# Altium PCB MolsonPCB.PcbDoc (part 6 of 9)
Units mil, origin at the board's own origin, x right, y up, seen from the top; angles counter-clockwise.
Board outline 8000 x 6000 mil, 14 copper layers (TopLayer (1 oz), InternalPlane1 (0.5 oz), InternalPlane2 (0.5 oz), MidLayer1 (0.5 oz), InternalPlane3 (0.5 oz), MidLayer2 (0.5 oz), InternalPlane4 (0.5 oz), InternalPlane5 (0.5 oz), MidLayer3 (0.5 oz), InternalPlane6 (0.5 oz), MidLayer4 (0.5 oz), InternalPlane7 (0.5 oz), InternalPlane8 (0.5 oz), BottomLayer (1 oz)), stack 86.2 mil thick; 657 components, 643 nets, 3094 pads, 1958 vias.
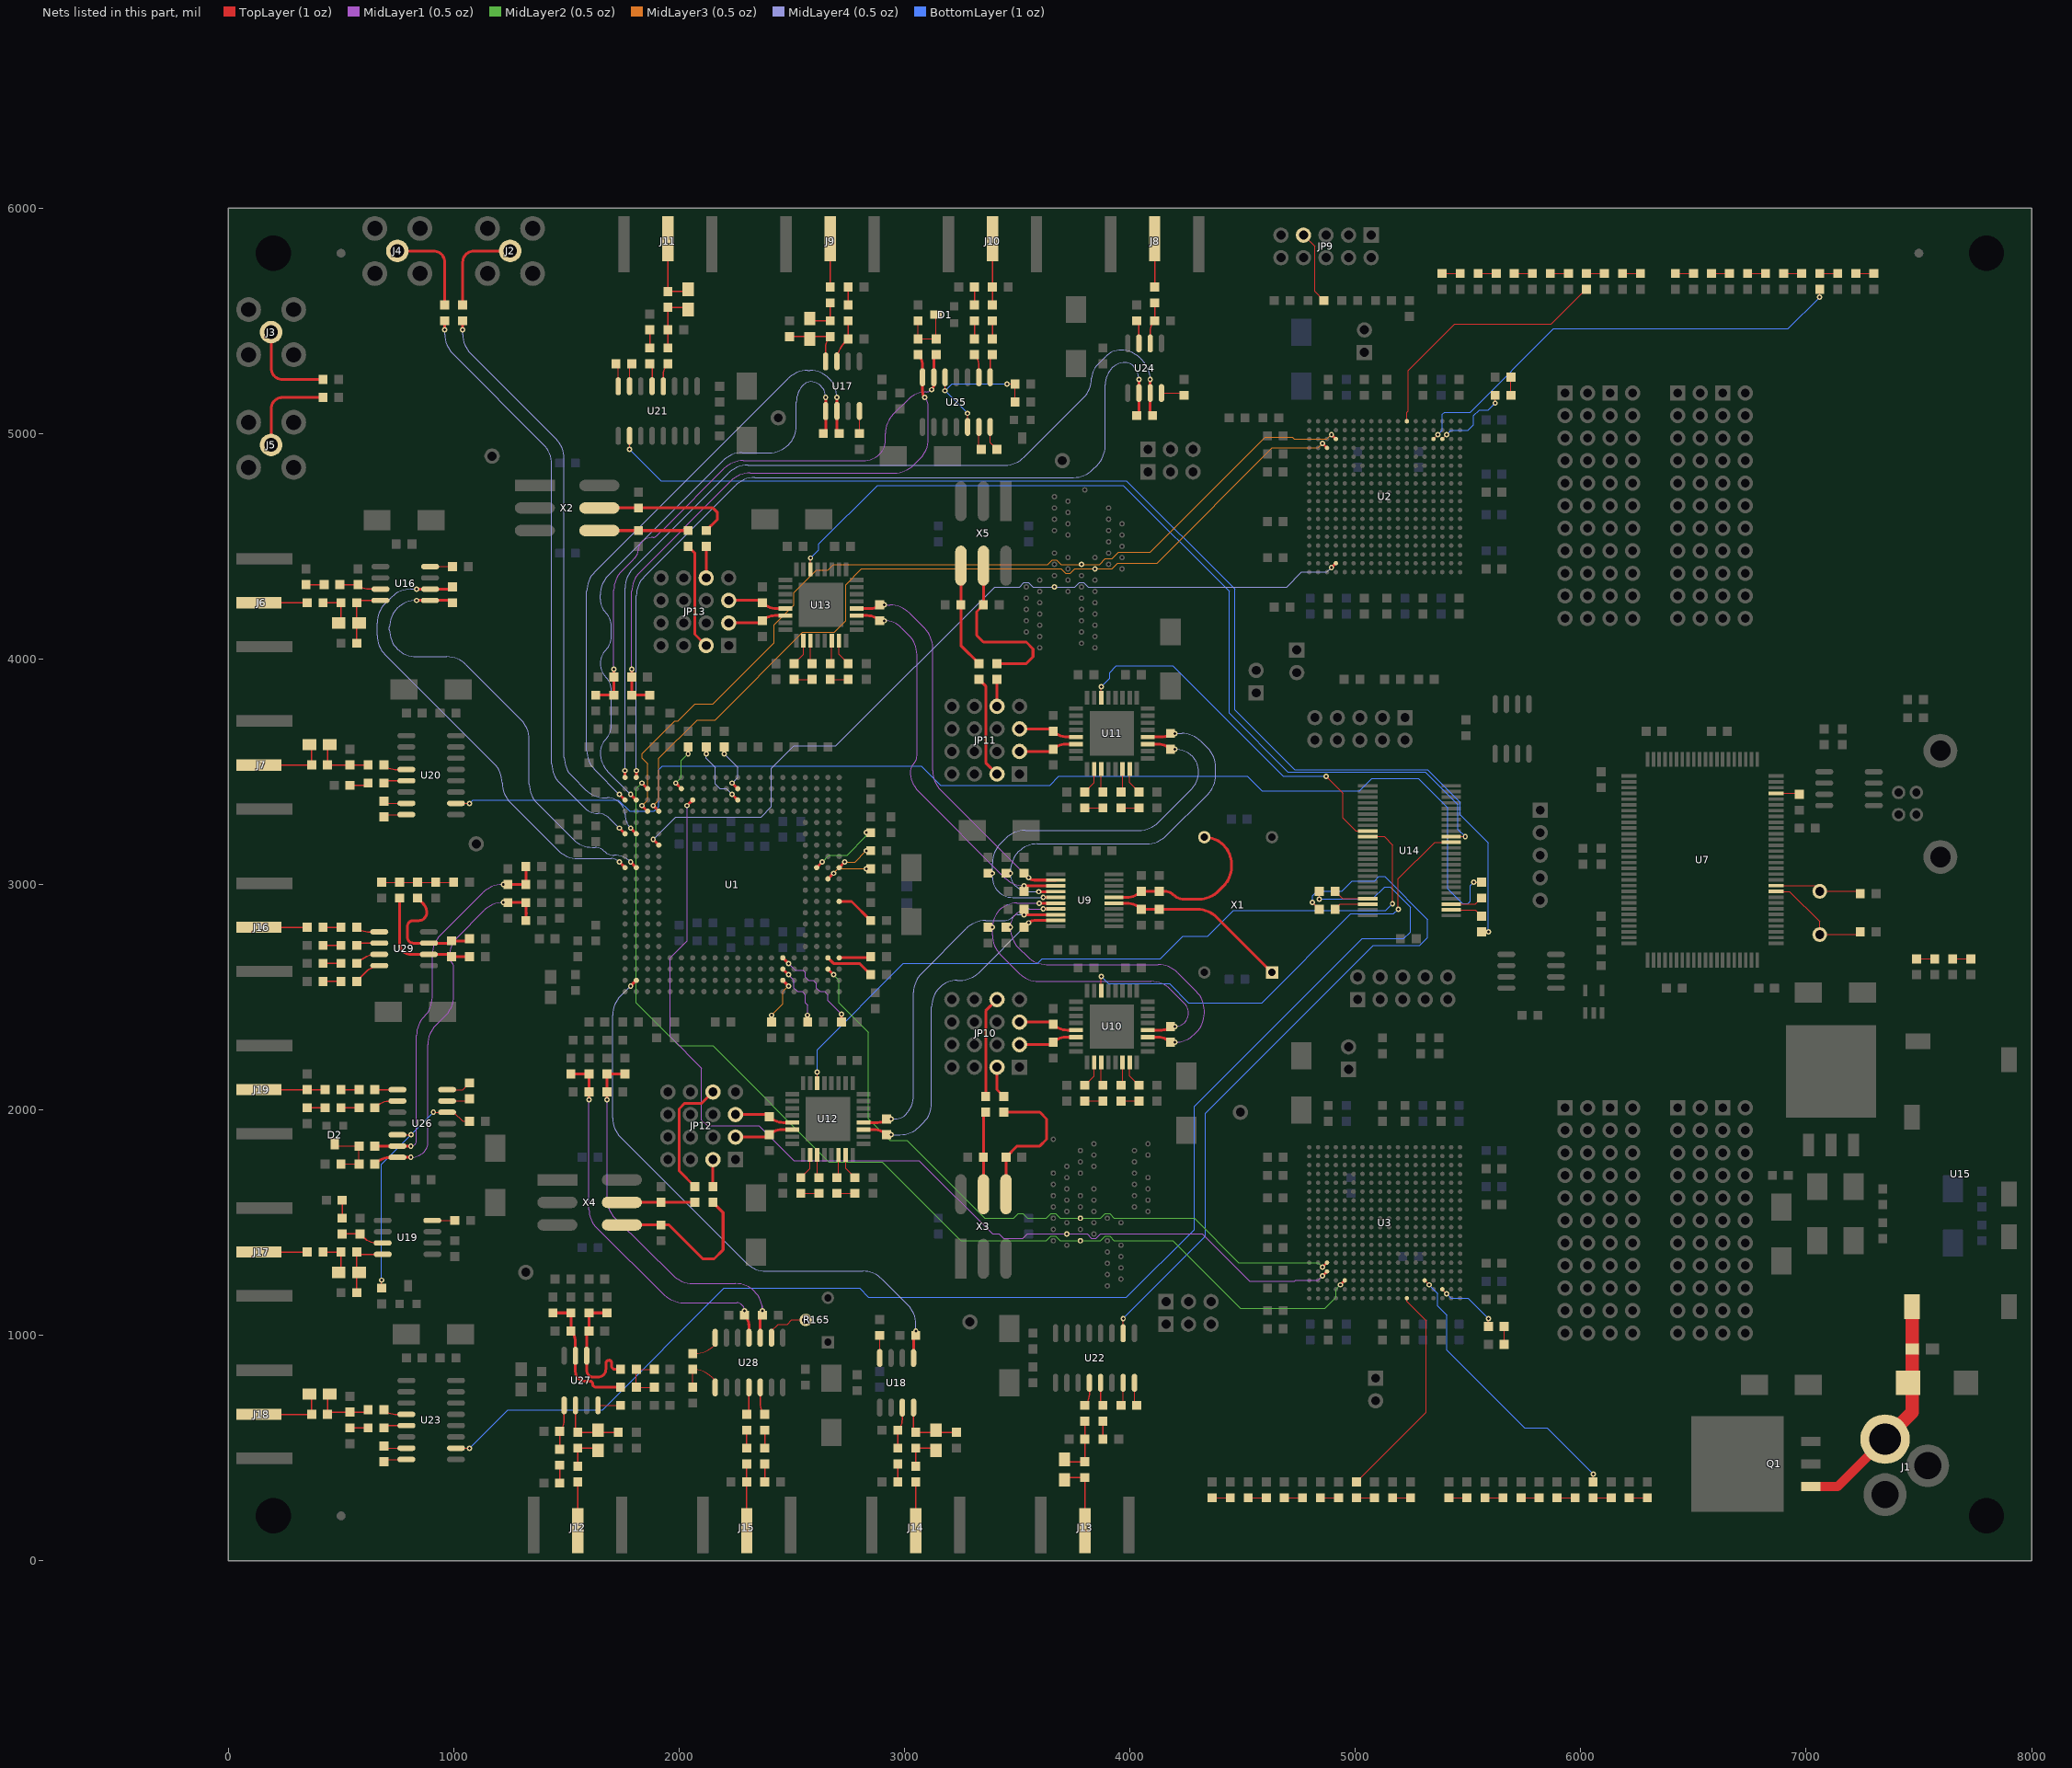
[diagram p18: the nets of this part, all layers, seen from the top]

## Via types
v1: diameter 24, hole 12, TopLayer (1 oz) to BottomLayer (1 oz), 1958 vias

## Nets (pads, with @x,y where several pads share a name; then routed paths per layer and width w, separated by ;. In a path a pad name is that pad's centre, name@x,y a point inside that pad or via, vN(x,y) a via of type N, cw(c..) or ccw(c..) an arc to the next point about the centre after c; other vN are vias at no path point) (continued)
L\F\I\D\: pad.TVIA@3780,1520 U1.W3 U3.T14 | length 3103.6
  TopLayer (1 oz) w12: U1.W3@2660,2625 v1(2685,2600) ; v1(4854.41,1303.15) U3.T14@4874.1,1322.84
  MidLayer2 (0.5 oz) w5: v1(2685,2600) 2710,2575 2710,2475 2840,2345 2840,1960 2935,1865 3010,1865 3355,1520 3485,1520 3505,1540 3525,1540 3545,1520 3630,1520 3650,1540 3670,1540 3690,1520 3870,1520 3890,1540 3910,1540 3930,1520 4285,1520 4482.17,1322.83 4834.72,1322.83 v1(4854.41,1303.15)
LDTDEN: pad.TVIA@3785,4420 U1.C17 U2.D16 | length 4062.2
  TopLayer (1 oz) w12: v1(1835,3350) U1.C17@1860,3325 ; v1(4893.78,4995.59) U2.D16@4913.47,4975.9
  MidLayer3 (0.5 oz) w5: v1(1835,3350) 1860,3375 1860,3535 1835,3560 1835,3580 1980,3725 1995,3725 2070.07,3800.07 2150.07,3800.07 2421.2,4071.2 2421.2,4151.2 2510,4240 2510,4295 2610,4395 2660,4395 2685,4420 3635,4420 3655,4440 3675,4440 3695,4420 3865,4420 3890,4445 3920,4445 3950,4475 4090,4475 4600,4985 4720,4985 4729.09,4975.91 4874.1,4975.91 v1(4893.78,4995.59)
LFIA_04: R168.1 U2.M18 | length 1167.2
  TopLayer (1 oz) w5: U2.M18@5228.43,5054.65 5228.43,5093.43 5235,5100 5235,5280 5440,5485 5870,5485 R168.1@6025,5640
LFIB_04: R174.1 U2.R16 | length 2050.4
  TopLayer (1 oz) w5: U2.R16@5346.53,4975.9 v1(5366.22,4995.59) ; v1(7060,5605) R174.1@7060,5640
  BottomLayer (1 oz) w5: v1(5366.22,4995.59) 5385.91,5015.28 5385.91,5085.91 5395,5095 5510,5095 5880,5465 6920,5465 v1(7060,5605)
LFIC_05: R180.1 U3.G18 | length 979.6
  TopLayer (1 oz) w5: R180.1@5005,350 5315,660 5315,1065 5228.43,1151.57 U3.G18@5228.43,1165.35
LFID_05: R186.1 U3.E16 | length 1262.4
  TopLayer (1 oz) w5: U3.E16@5307.16,1244.1 v1(5326.85,1224.41) ; R186.1@6055,350 v1(6055,385)
  BottomLayer (1 oz) w5: v1(5326.85,1224.41) 5365,1186.26 5365,1130 5405,1090 5405,935 5750,590 5850,590 v1(6055,385)
LOCKEDA_07: U11.14 U14.33 | length 1652.2
  TopLayer (1 oz) w5: U11.14@3872.76,3828.46 v1(3872.76,3877.24) ; v1(4870,3480) 4945,3405 4945,3295 5002.5,3237.5 U14.33@5054.96,3237.5
  BottomLayer (1 oz) w5: v1(3872.76,3877.24) 3910,3914.49 3910,3940 3940,3970 4190,3970 4680,3480 v1(4870,3480)
LOCKEDB_07: U13.14 U14.15 | length 4190.5
  TopLayer (1 oz) w5: U13.14@2582.76,4398.46 v1(2582.76,4447.76) ; U14.15@5425.04,3212.5 v1(5487.5,3212.5)
  BottomLayer (1 oz) w5: v1(2582.76,4447.76) 2620,4485 2620,4510 2880,4770 3970,4770 4440,4300 4440,3760 4700,3500 5310,3500 5455,3355 5455,3245 v1(5487.5,3212.5)
LOCKEDC_07: U12.14 U14.34 | length 3355.2
  TopLayer (1 oz) w5: U12.14@2612.76,2118.46 v1(2612.76,2167.76) ; U14.34@5054.96,3212.5 5127.5,3212.5 5165,3175 v1(5165,2915)
  BottomLayer (1 oz) w5: v1(2612.76,2167.76) 2612.76,2267.76 2995,2650 3590,2650 3610,2670 4135,2670 4235,2770 4345,2770 4460,2885 5135,2885 v1(5165,2915)
LOCKEDD_07: U10.14 U14.14 | length 2039.6
  TopLayer (1 oz) w5: U10.14@3872.76,2528.46 v1(3872.76,2592.76) ; v1(5190,2890) 5190,3025 5352.5,3187.5 U14.14@5425.04,3187.5
  BottomLayer (1 oz) w5: v1(3872.76,2592.76) 3905.51,2560 4175,2560 4260,2475 4585,2475 4980,2870 5170,2870 v1(5190,2890)
LPENA: pad.TVIA@3845,4400 U1.D17 U2.C15 | length 3916.6
  TopLayer (1 oz) w12: v1(1885,3350) U1.D17@1910,3325 ; v1(4854.41,4956.22) U2.C15@4874.1,4936.53
  MidLayer3 (0.5 oz) w5: v1(1885,3350) 1910,3375 1910,3560 2080,3730 2160,3730 2548.26,4118.26 2688.26,4118.26 2740,4170 2740,4330 2810,4400 3695,4400 3715,4380 3735,4380 3755,4400 3920,4400 3945,4425 4120,4425 4631.54,4936.54 4834.73,4936.54 v1(4854.41,4956.22)
LPENB: pad.TVIA@3665,4320 U1.D14 U2.D2 | length 3703.8
  TopLayer (1 oz) w12: v1(1885,3200) U1.D14@1910,3175 ; v1(4893.78,4405.04) U2.D2@4913.47,4424.73
  MidLayer4 (0.5 oz) w5: v1(1885,3200) 1985,3300 2365,3300 2410,3345 2410,3515 2510,3615 2695,3615 3400,4320 3510,4320 3530,4340 3550,4340 3570,4320 3755,4320 3775,4340 3795,4340 3815,4320 4695,4320 4760.35,4385.35 4874.1,4385.35 v1(4893.78,4405.04)
LPENC: pad.TVIA@3720,1450 U1.G18 U3.T15 | length 4640.8
  TopLayer (1 oz) w12: v1(2035,3350) U1.G18@2060,3375 ; v1(4854.41,1263.78) U3.T15@4874.1,1283.47
  MidLayer1 (0.5 oz) w5: v1(2035,3350) 2035,2750 1960,2675 1960,2325 2100,2185 2100,1955 2125,1930 2355,1930 2510,1775 3065,1775 3390,1450 3420,1450 3440,1430 3525,1430 3545,1450 3810,1450 3830,1430 3850,1430 3870,1450 4320,1450 4530,1240 4730,1240 4734.09,1244.09 4834.73,1244.09 v1(4854.41,1263.78)
LPEND: pad.TVIA@3780,1420 U1.C19 U3.P16 | length 4830.6
  TopLayer (1 oz) w12: v1(1835,3450) U1.C19@1860,3425 ; v1(4933.15,1224.41) U3.P16@4952.84,1244.1
  MidLayer2 (0.5 oz) w5: v1(1835,3450) 1810,3425 1810,2475 2000,2285 2150,2285 2665,1770 2900,1770 3250,1420 3630,1420 3650,1440 3670,1440 3690,1420 3870,1420 3890,1440 3910,1440 3930,1420 4190,1420 4490,1120 4865,1120 4913.47,1168.47 4913.47,1204.72 v1@4933.15,1224.41
MCLADJA: R22.1 U20.10 | length 5379
  TopLayer (1 oz) w5: U20.10@1010,3360 v1(1070,3360) ; v1(5525,3010) R22.1@5560,3010
  BottomLayer (1 oz) w5: v1(1070,3360) 1085,3375 1730,3375 1780,3325 1890,3325 1910,3345 1910,3510 1925,3525 3075,3525 3160,3440 3645,3440 3685,3480 4520,3480 4585,3415 5019.14,3415 5074.14,3470 5280,3470 5410,3340 5410,2980 5475,2915 5500,2915 5510,2925 5510,2995 v1(5525,3010)
MCLADJB: R20.1 U21.10 | length 5363.4
  TopLayer (1 oz) w5: v1(1780,4930) U21.10@1780,4990 ; R20.1@5560,2790 v1(5590,2790)
  BottomLayer (1 oz) w5: v1(1780,4930) 1920,4790 3985,4790 4465,4310 4465,3775 4730,3510 5320,3510 5465,3365 5465,3310 5590,3185 v1(5590,2790)
MCLADJC: R19.2 U22.10 | length 3210.6
  TopLayer (1 oz) w5: U22.10@3970,1010 v1(3970,1075) ; v1(4810,2920) R19.2@4840,2890
  BottomLayer (1 oz) w5: v1(3970,1075) 4335,1440 4335,1985 5080,2730 5285,2730 5320,2765 5320,2845 5130,3035 5105,3035 5085,3015 4985,3015 4940,2970 4830,2970 4810,2950 v1(4810,2920)
MCLADJD: R21.2 U23.10 | length 6146
  TopLayer (1 oz) w5: U23.10@1010,500 v1(1070,500) ; v1(4840,2935) R21.2@4840,2970
  BottomLayer (1 oz) w5: v1(1070,500) 1240,670 1660,670 2200,1210 2800,1210 2840,1170 3985,1170 4285,1470 4285,2015 5030,2760 5215,2760 5245,2790 5245,2900 5155,2990 5130,2990 5075,2935 v1(4840,2935)
NetC41_2: C41.2 U7.10 Y1.2 | length 465.8
  TopLayer (1 oz) w5: U7.10@6866.97,2969.25 6925.75,2969.25 7060,2835 Y1.2@7060,2797.87 ; Y1.2@7060,2777.87 C41.2@7240,2777.87
NetC42_2: C42.2 U7.11 Y1.1 | length 383.3
  TopLayer (1 oz) w5: U7.11@6866.97,2994.84 7035.16,2994.84 Y1.1@7060,2970 C42.2@7240,2970
NetC43_1: C43.1 R23.2 | length 80
  TopLayer (1 oz) w5: C43.1@3960,2040 R23.2@4040,2040
NetC43_2: C43.2 U10.30 | length 101.5
  TopLayer (1 oz) w5: C43.2@3967.24,2110 U10.30@3967.24,2211.54
NetC44_1: C44.1 R24.2 | length 80
  TopLayer (1 oz) w5: C44.1@3800,2040 R24.2@3880,2040
NetC44_2: C44.2 U10.26 | length 118.6
  TopLayer (1 oz) w5: C44.2@3800,2110 3841.26,2151.26 U10.26@3841.26,2211.54
NetC48_1: C48.1 R25.2 | length 80
  TopLayer (1 oz) w5: C48.1@3960,3340 R25.2@4040,3340
NetC48_2: C48.2 U11.30 | length 101.5
  TopLayer (1 oz) w5: C48.2@3967.24,3410 U11.30@3967.24,3511.54
NetC49_1: C49.1 R26.2 | length 80
  TopLayer (1 oz) w5: C49.1@3800,3340 R26.2@3880,3340
NetC49_2: C49.2 U11.26 | length 118.6
  TopLayer (1 oz) w5: C49.2@3800,3410 3841.26,3451.26 U11.26@3841.26,3511.54
NetC53_1: C53.1 R27.2 | length 80
  TopLayer (1 oz) w5: C53.1@2700,1630 R27.2@2780,1630
NetC53_2: C53.2 U12.30 | length 101.5
  TopLayer (1 oz) w5: C53.2@2707.24,1700 U12.30@2707.24,1801.54
NetC54_1: C54.1 R28.2 | length 80
  TopLayer (1 oz) w5: C54.1@2540,1630 R28.2@2620,1630
NetC54_2: C54.2 U12.26 | length 118.6
  TopLayer (1 oz) w5: C54.2@2540,1700 2581.26,1741.26 U12.26@2581.26,1801.54
NetC58_1: C58.1 R29.2 | length 80
  TopLayer (1 oz) w5: C58.1@2670,3910 R29.2@2750,3910
NetC58_2: C58.2 U13.30 | length 101.5
  TopLayer (1 oz) w5: C58.2@2677.24,3980 U13.30@2677.24,4081.54
NetC59_1: C59.1 R30.2 | length 80
  TopLayer (1 oz) w5: C59.1@2510,3910 R30.2@2590,3910
NetC59_2: C59.2 U13.26 | length 118.6
  TopLayer (1 oz) w5: C59.2@2510,3980 2551.26,4021.26 U13.26@2551.26,4081.54
NetC63_1: C63.1 C198.1 J1.1 Q1.1 U15.P1 | length 1054.8
  TopLayer (1 oz) w40: Q1.1@7020,330 7140,330 J1.1@7350,540
  TopLayer (1 oz) w60: J1.1@7350,540 7469.8,659.8 U15.P1@7469.8,1128.23
NetC67_2: C67.2 J2.1 | length 428.5
  TopLayer (1 oz) w12.34: C67.2@1040,5570 1040,5760 cw(c1090,5760) 1090,5810 J2.1@1250,5810
NetC68_2: C68.2 J3.1 | length 418.5
  TopLayer (1 oz) w12.34: J3.1@190,5450 190,5290 ccw(c240,5290) 240,5240 C68.2@420,5240
NetC69_1: C69.1 L1.2 R81.2 | length 170
  TopLayer (1 oz) w5.56: C69.1@420,4250 R81.2@500,4250 L1.2@500,4160
NetC69_2: C69.2 J6.1 | length 215
  TopLayer (1 oz) w5.56: J6.1@135,4250 C69.2@350,4250
NetC70_2: C70.2 J4.1 | length 428.5
  TopLayer (1 oz) w12.34: J4.1@750,5810 910,5810 cw(c910,5760) 960,5760 C70.2@960,5570
NetC71_2: C71.2 J5.1 | length 418.5
  TopLayer (1 oz) w12.34: J5.1@190,4950 190,5110 cw(c240,5110) 240,5160 C71.2@420,5160
NetC72_1: C72.1 U20.4 | length 105.3
  TopLayer (1 oz) w5.56: C72.1@690,3530 ccw(c738.28,3578.28) 738.28,3510 U20.4@790,3510
NetC72_2: C72.2 L5.1 R82.1 R83.2 | length 270
  TopLayer (1 oz) w5.56: L5.1@440,3620 R82.1@440,3530 R83.2@540,3530 C72.2@620,3530
NetC74_1: C74.1 U20.5 | length 100
  TopLayer (1 oz) w5.56: C74.1@690,3460 U20.5@790,3460
NetC74_2: C74.2 R130.2 | length 80
  TopLayer (1 oz) w5.56: R130.2@540,3440 C74.2@620,3440
NetC75_1: C75.1 R84.1 U24.6 | length 185.3
  TopLayer (1 oz) w5.56: U24.6@4090,5400 4090,5451.72 cw(c4158.28,5451.72) R84.1@4110,5500 C75.1@4110,5580
NetC75_2: C75.2 J8.1 | length 215
  TopLayer (1 oz) w5.56: C75.2@4110,5650 J8.1@4110,5865
NetC76_1: C76.1 D1.3 R85.2 R86.2 | length 268
  TopLayer (1 oz) w5: C76.1@3060,5500 R85.2@3060,5420 R86.2@3140,5420 D1.3@3140,5528
NetC77_1: C77.1 R85.1 R126.1 R138.2 U25.14 | length 2529.7
  TopLayer (1 oz) w12.34: v1(1790,3955) R126.1@1790,3920 C77.1@1790,3840 R138.2@1870,3840 ; R85.1@3060,5350 cw(c3012.05,5302.05) 3079.86,5302.05 U25.14@3079.86,5249.68 ; U25.14@3080,5220 3080,5184.14 ccw(c3114.14,5184.14) v1(3090,5160)
  MidLayer1 (0.5 oz) w5.07: v1(1790,3955) 1790,4300 cw(c1910.71,4300) 1825,4385 ; 1825.36,4385.36 ccw(c1910.71,4300) 1825,4385 ; 2229.29,4789.29 1825,4385 ; 2229.64,4789.64 cw(c2315,4704.29) 2315,4825 2955,4825 ccw(c2955,4945.71) 3040.36,4860.36 3069.64,4889.64 ccw(c2984.29,4975) 3105,4975 3105,5123.79 ccw(c3053.79,5123.79) v1(3090,5160)
NetC78_1: C78.1 L2.2 R89.2 | length 170
  TopLayer (1 oz) w5.56: L2.2@2580,5500 R89.2@2670,5500 C78.1@2670,5580
NetC78_2: C78.2 J9.1 | length 215
  TopLayer (1 oz) w5.56: C78.2@2670,5650 J9.1@2670,5865
NetC79_1: C79.1 R86.1 R127.2 R139.1 U25.13 | length 2533.3
  TopLayer (1 oz) w12.34: R139.1@1630,3840 C79.1@1710,3840 R127.2@1710,3920 v1(1710,3955) ; v1(3119.39,5194.39) ccw(c3093.79,5220) U25.13@3130,5220 ; U25.13@3129.86,5249.68 R86.1@3129.86,5349.86
  MidLayer1 (0.5 oz) w5.07: v1(1710,3955) 1710,4305 cw(c1830.71,4305) 1745.36,4390.36 1794.67,4439.67 1802.32,4447.32 ; 1802.36,4447.36 ccw(c1759.64,4490) 1820,4490 cw(c1856.21,4490) 1830.61,4515.61 1833.79,4518.79 cw(c1885,4467.57) 1885,4540 ccw(c1885,4564.14) 1902.05,4547.05 1943.74,4588.74 2199.64,4844.64 cw(c2285,4759.29) 2285,4880 2817.57,4880 ccw(c2817.57,4982.43) 2890,4910 ccw(c2829.64,4970.36) 2915,4970.36 2915,5000 cw(c3035.71,5000) 2950.36,5085.36 3016.97,5151.97 cw(c3096.72,5072.22) 3096.72,5185 ccw(c3096.72,5217.07) v1(3119.39,5194.39)
NetC80_1: C80.1 R66.1 | length 80
  TopLayer (1 oz) w5.56: R66.1@3310,5420 C80.1@3310,5500
NetC80_2: C80.2 R132.2 | length 80
  TopLayer (1 oz) w5.56: C80.2@3310,5570 R132.2@3310,5650
NetC81_1: C81.1 R217.1 U25.5 U25.12 | length 663.7
  TopLayer (1 oz) w5: v1@3179.86,5190.14 U25.12@3179.86,5249.68 ; U25.5@3280,5029.68 v1(3280,5090) ; v1(3455,5220) C81.1@3490,5220 R217.1@3490,5140
  BottomLayer (1 oz) w5: v1(3280,5090) v1(3180,5190) 3210,5220 v1(3455,5220)
NetC82_1: C82.1 U21.4 | length 105.3
  TopLayer (1 oz) w5.56: U21.4@1930,5210 1930,5261.72 cw(c1998.28,5261.72) C82.1@1950,5310
NetC82_2: C82.2 L6.1 R90.1 R92.2 | length 270
  TopLayer (1 oz) w5.56: C82.2@1950,5380 R92.2@1950,5460 R90.1@1950,5560 L6.1@2040,5560
NetC83_1: C83.1 U25.6 | length 99.5
  TopLayer (1 oz) w5: C83.1@3329.86,4930.14 U25.6@3329.86,5029.68
NetC83_2: C83.2 U25.7 | length 112.2
  TopLayer (1 oz) w5: U25.7@3379.86,5029.68 3379.86,4960.14 C83.2@3410,4930
NetC84_1: C84.1 R69.1 | length 80
  TopLayer (1 oz) w5.56: R69.1@3390,5420 C84.1@3390,5500
NetC84_2: C84.2 J10.1 R91.2 | length 295
  TopLayer (1 oz) w5.56: C84.2@3390,5570 R91.2@3390,5650 J10.1@3390,5865
NetC86_1: C86.1 U21.5 | length 100
  TopLayer (1 oz) w5.56: U21.5@1880,5210 C86.1@1880,5310
NetC86_2: C86.2 R133.2 | length 80
  TopLayer (1 oz) w5.56: C86.2@1870,5380 R133.2@1870,5460
NetC90_2: C90.2 R147.1 R151.1 R161.1 U27.6 | length 584.9
  TopLayer (1 oz) w12.34: R147.1@1590,1020 U27.6@1590,910 1590,845 ccw(c1620,845) 1620,815 1640,815 ccw(c1640,850) 1675,850 1675,875 cw(c1690,875) 1690,890 cw(c1690,880) 1700,880 1700,865 ccw(c1715,865) 1715,850 R161.1@1740,850 ; R147.1@1600,1020 C90.2@1600,1100 R151.1@1680,1100
NetC91_1: C91.1 L9.2 R94.2 | length 170
  TopLayer (1 oz) w5.56: C91.1@1550,420 R94.2@1550,500 L9.2@1640,500
NetC91_2: C91.2 J12.1 | length 215
  TopLayer (1 oz) w5.56: J12.1@1550,135 C91.2@1550,350
NetC92_2: C92.2 R148.1 R152.2 R160.1 U27.7 | length 586.9
  TopLayer (1 oz) w12.34: R152.2@1440,1100 1470,1100 ccw(c1470,1100.5) 1470.5,1100.5 cw(c1471,1100.5) 1471.5,1100.5 ccw(c1472,1100.5) 1472,1100 C92.2@1520,1100 R148.1@1520,1020 cw(c1471.72,971.72) 1540,971.72 U27.7@1540,910 1540,839 ccw(c1581,839) 1581,798 1604,798 cw(c1604,786) 1616,786 ccw(c1632,786) 1617.61,779 ccw(c1632,786) 1632,770 R160.1@1740,770
NetC93_1: C93.1 R120.2 | length 80
  TopLayer (1 oz) w5.56: C93.1@1470,345 R120.2@1470,425
NetC96_1: C96.1 U22.4 | length 105.3
  TopLayer (1 oz) w5.56: C96.1@3800,690 ccw(c3751.72,738.28) 3820,738.28 U22.4@3820,790
NetC96_2: C96.2 L7.1 R97.1 R101.2 | length 270
  TopLayer (1 oz) w5.56: L7.1@3710,440 R97.1@3800,440 R101.2@3800,540 C96.2@3800,620
NetC97_1: C97.1 L3.2 R98.2 | length 170
  TopLayer (1 oz) w5.56: C97.1@3050,420 R98.2@3050,500 L3.2@3140,500
NetC97_2: C97.2 J14.1 | length 215
  TopLayer (1 oz) w5.56: J14.1@3050,135 C97.2@3050,350
NetC98_1: C98.1 U22.5 | length 100
  TopLayer (1 oz) w5.56: C98.1@3870,690 U22.5@3870,790
NetC98_2: C98.2 R134.2 | length 80
  TopLayer (1 oz) w5.56: R134.2@3880,540 C98.2@3880,620
NetC99_1: C99.1 U28.14 | length 104.8
  TopLayer (1 oz) w5: C99.1@2060,920 2070,920 ccw(c2070,1040.71) U28.14@2155.36,955.36
NetC99_2: C99.2 C100.2 U28.1 | length 195.5
  TopLayer (1 oz) w5: C100.2@2060,770 C99.2@2060,850 cw(c2060,729.29) 2145.36,814.64 U28.1@2160,800
NetC102_2: C102.2 R99.1 R149.1 R153.1 U28.11 | length 1685.3
  TopLayer (1 oz) w12.34: R153.1@1520,2160 C102.2@1600,2160 R149.1@1600,2080 v1(1600,2045) ; R99.1@2290,1090 cw(c2242.05,1042.05) 2309.86,1042.05 U28.11@2309.86,989.68
  MidLayer1 (0.5 oz) w5.07: v1(1600,2045) 1600,1560 ccw(c1720.71,1560) 1635.36,1474.64 1934.64,1180.36 ccw(c2020,1265.71) 2020,1145 2256.72,1145 cw(c2256.72,1112.93) 2279.39,1135.61 cw(c2253.79,1110) v1(2290,1110)
NetC103_1: C103.1 U28.4 | length 119.5
  TopLayer (1 oz) w5.56: C103.1@2309.86,650.14 U28.4@2309.86,769.68
NetC103_2: C103.2 R102.1 | length 80
  TopLayer (1 oz) w5.56: R102.1@2300,500 C103.2@2300,580
NetC104_2: C104.2 R100.1 R150.1 R154.2 U28.10 | length 1686.7
  TopLayer (1 oz) w12.34: v1(1680,2045) R150.1@1680,2080 C104.2@1680,2160 R154.2@1760,2160 ; U28.10@2359.86,989.68 R100.1@2359.86,1089.86
  MidLayer1 (0.5 oz) w5.07: v1(1680,2045) 1680,1605 ccw(c1800.71,1605) 1715.36,1519.64 1974.64,1265.36 ccw(c2060,1350.71) 2060,1230 2251.01,1230 cw(c2251.01,1111.72) 2334.64,1195.36 cw(c2249.29,1110) v1(2370,1110) 2370,1130
NetC105_1: C105.1 U28.5 | length 125.1
  TopLayer (1 oz) w5.56: U28.5@2359.86,769.68 2359.86,698.62 ccw(c2428.62,698.62) C105.1@2380,650
NetC105_2: C105.2 R104.1 | length 80
  TopLayer (1 oz) w5.56: R104.1@2380,500 C105.2@2380,580
NetC106_1: C106.1 R122.2 | length 80
  TopLayer (1 oz) w5.56: R122.2@420,2730 C106.1@500,2730
NetC106_2: C106.2 U29.2 | length 100
  TopLayer (1 oz) w5.56: C106.2@570,2740 U29.2@670,2740
NetC108_1: C108.1 R123.2 | length 80
  TopLayer (1 oz) w5.56: R123.2@420,2650 C108.1@500,2650
NetC108_2: C108.2 U29.3 | length 104.8
  TopLayer (1 oz) w5.56: C108.2@574.64,2654.64 cw(c660,2569.29) 660,2690 U29.3@670,2690
NetC109_1: C109.1 R124.2 | length 80
  TopLayer (1 oz) w5.56: R124.2@420,2570 C109.1@500,2570
NetC109_2: C109.2 U29.4 | length 125.9
  TopLayer (1 oz) w5.56: C109.2@570,2570 618.79,2618.79 cw(c670,2567.57) U29.4@670,2640
NetC110_2: C110.2 R57.1 R73.1 R162.2 U29.7 | length 537.5
  TopLayer (1 oz) w12.34: R162.2@840,2940 862.32,2917.68 cw(c819.64,2875) 880,2875 cw(c845,2875) 845,2840 820,2840 ccw(c820,2815) 795,2815 795,2765 ccw(c820,2765) 820,2740 U29.7@890,2740 R73.1@990,2740 ; R73.1@990,2750 R57.1@1070,2750
NetC111_1: C111.1 R105.2 | length 80
  TopLayer (1 oz) w5.56: R105.2@420,2810 C111.1@500,2810
NetC111_2: C111.2 U29.1 | length 105.3
  TopLayer (1 oz) w5.56: C111.2@570,2810 ccw(c618.28,2858.28) 618.28,2790 U29.1@670,2790
NetC112_2: C112.2 R58.1 R73.2 R163.2 U29.6 | length 538.5
  TopLayer (1 oz) w12.34: R163.2@760,2940 760,2740 ccw(c810,2740) 810,2690 U29.6@890,2690 R73.2@990,2690 ; R73.2@990,2680 R58.1@1070,2680
NetC113_1: C113.1 D2.3 R106.2 R107.2 | length 268
  TopLayer (1 oz) w5: D2.3@472,1840 R107.2@580,1840 R106.2@580,1760 C113.1@500,1760
NetC114_1: C114.1 L4.2 R59.2 | length 170
  TopLayer (1 oz) w5.56: C114.1@420,1370 R59.2@500,1370 L4.2@500,1280
NetC114_2: C114.2 J17.1 | length 215
  TopLayer (1 oz) w5.56: J17.1@135,1370 C114.2@350,1370
NetC115_1: C115.1 U23.4 | length 105.3
  TopLayer (1 oz) w5.56: C115.1@690,670 ccw(c738.28,718.28) 738.28,650 U23.4@790,650
NetC115_2: C115.2 L8.1 R110.1 R111.2 | length 270
  TopLayer (1 oz) w5.56: R110.1@440,650 R110.1@440,660 ; L8.1@440,740 R110.1@440,660 ; C115.2@620,660 R111.2@540,660 R110.1@440,660
NetC116_1: C116.1 R106.1 R128.1 R140.2 U26.14 | length 1668
  TopLayer (1 oz) w12.34: R106.1@650,1760 cw(c722.09,1687.91) 722.09,1789.86 U26.14@750.32,1789.86 v1(809.86,1789.86) ; R128.1@1240,2920 1270,2920 ccw(c1270,2920.25) 1270.25,2920.25 cw(c1270.5,2920.25) 1270.75,2920.25 ccw(c1271,2920.25) 1271,2920 C116.1@1320,2920 1320,2875 ccw(c1321.25,2875) 1321.25,2873.75 cw(c1321.25,2872.5) 1321.25,2871.25 ccw(c1321.25,2870) 1320,2870 R140.2@1320,2840
  MidLayer1 (0.5 oz) w5.07: v1(809.86,1789.86) ccw(c809.86,1874.36) 869.61,1814.61 ccw(c832.45,1851.77) 885,1851.77 885,2290 cw(c1005.71,2290) 920.36,2375.36 964.64,2419.64 ccw(c879.29,2505) 1000,2505 1000,2631.72 ccw(c967.93,2631.72) 998.74,2640.63 ccw(c967.93,2631.72) 990.61,2654.39 cw(c1016.21,2680) 980,2680 cw(c1100.71,2680) 1015.36,2765.36 1134.64,2884.64 cw(c1220,2799.29) v1(1220,2920)
NetC117_1: C117.1 U23.5 | length 100
  TopLayer (1 oz) w5.56: C117.1@690,600 U23.5@790,600
NetC117_2: C117.2 R136.2 | length 80
  TopLayer (1 oz) w5.56: R136.2@540,590 C117.2@620,590
NetC118_2: C118.2 R117.1 R162.1 R163.1 R166.2 | length 320
  TopLayer (1 oz) w5: R166.2@680,3010 R163.1@760,3010 R162.1@840,3010 R117.1@920,3010 C118.2@1000,3010
NetC119_1: C119.1 R107.1 R129.2 R141.1 U26.13 | length 1665.2
  TopLayer (1 oz) w12.34: R107.1@650.14,1839.86 U26.13@750.32,1839.86 v1(809.86,1839.86) ; R129.2@1240,3000 C119.1@1320,3000 R141.1@1320,3080
  MidLayer1 (0.5 oz) w5.07: v1(809.86,1839.86) ccw(c809.86,1865) 835,1865 835,2331.01 cw(c953.28,2331.01) 869.64,2414.64 ccw(c784.29,2500) 905,2500 905,2690 cw(c1025.71,2690) 940.36,2775.36 1129.64,2964.64 cw(c1215,2879.29) 1215,3000 v1(1220,3000)
NetC121_1: C121.1 R77.1 | length 80
  TopLayer (1 oz) w5.56: C121.1@500,2010 R77.1@580,2010
NetC121_2: C121.2 R137.2 | length 80
  TopLayer (1 oz) w5.56: R137.2@350,2010 C121.2@430,2010
NetC122_1: C122.1 R218.1 U26.5 U26.12 | length 1111
  TopLayer (1 oz) w5: R218.1@680,1210 v1(680,1245) ; U26.12@750.32,1889.86 v1@809.86,1889.86 ; v1(909.86,1989.86) U26.5@970.32,1989.86 1000.14,1989.86 1040,1950 C122.1@1070,1950
  BottomLayer (1 oz) w5: v1(680,1245) 680,1759.72 v1(810.14,1889.86) ; v1@810.14,1890.14 v1(909.86,1989.86)
NetC123_1: C123.1 U26.6 | length 99.7
  TopLayer (1 oz) w5: U26.6@970.32,2039.86 C123.1@1070,2039.86
NetC123_2: C123.2 U26.7 | length 112.2
  TopLayer (1 oz) w5: U26.7@970.32,2089.86 1039.86,2089.86 C123.2@1070,2120
NetC124_1: C124.1 R78.1 | length 80
  TopLayer (1 oz) w5.56: C124.1@500,2090 R78.1@580,2090
NetC124_2: C124.2 J19.1 R112.2 | length 295
  TopLayer (1 oz) w5.56: J19.1@135,2090 R112.2@350,2090 C124.2@430,2090
NetC134_1: C134.1 U20.7 | length 100
  TopLayer (1 oz) w5: C134.1@690,3360 U20.7@790,3360
NetC134_2: C134.2 U20.8 | length 100
  TopLayer (1 oz) w5: C134.2@690,3310 U20.8@790,3310
NetC135_1: C135.1 U21.7 | length 100
  TopLayer (1 oz) w5: U21.7@1780,5210 C135.1@1780,5310
NetC135_2: C135.2 U21.8 | length 100
  TopLayer (1 oz) w5: U21.8@1730,5210 C135.2@1730,5310
NetC136_1: C136.1 U22.7 | length 100
  TopLayer (1 oz) w5: C136.1@3970,690 U22.7@3970,790
NetC136_2: C136.2 U22.8 | length 100
  TopLayer (1 oz) w5: C136.2@4020,690 U22.8@4020,790
NetC137_1: C137.1 U23.7 | length 100
  TopLayer (1 oz) w5: C137.1@690,500 U23.7@790,500
NetC137_2: C137.2 U23.8 | length 100
  TopLayer (1 oz) w5: C137.2@690,450 U23.8@790,450
NetC199_1: C199.1 R118.1 | length 80
  TopLayer (1 oz) w5.56: C199.1@345,4330 R118.1@425,4330
NetC200_1: C200.1 R119.1 | length 80
  TopLayer (1 oz) w5.56: R119.1@2750,5570 C200.1@2750,5650
NetC201_1: C201.1 R121.1 | length 80
  TopLayer (1 oz) w5.56: C201.1@2970,350 R121.1@2970,430
NetC202_1: C202.1 R125.1 | length 80
  TopLayer (1 oz) w5.56: R125.1@505,1520 C202.1@505,1600
NetD3_1: D3.1 R168.2 | length 80
  TopLayer (1 oz) w5: R168.2@6025,5710 D3.1@6105,5710
NetD4_1: D4.1 R169.2 | length 80
  TopLayer (1 oz) w5: R169.2@6185,5710 D4.1@6265,5710
NetD5_1: D5.1 R170.2 | length 80
  TopLayer (1 oz) w5: R170.2@5865,5710 D5.1@5945,5710
NetD6_1: D6.1 R171.2 | length 80
  TopLayer (1 oz) w5: R171.2@5705,5710 D6.1@5785,5710
NetD7_1: D7.1 R172.2 | length 80
  TopLayer (1 oz) w5: R172.2@5545,5710 D7.1@5625,5710
NetD8_1: D8.1 R173.2 | length 80
  TopLayer (1 oz) w5: R173.2@5385,5710 D8.1@5465,5710
NetD9_1: D9.1 R174.2 | length 80
  TopLayer (1 oz) w5: R174.2@7060,5710 D9.1@7140,5710
NetD10_1: D10.1 R175.2 | length 80
  TopLayer (1 oz) w5: R175.2@7220,5710 D10.1@7300,5710
NetD11_1: D11.1 R176.2 | length 80
  TopLayer (1 oz) w5: R176.2@6900,5710 D11.1@6980,5710
NetD12_1: D12.1 R177.2 | length 80
  TopLayer (1 oz) w5: R177.2@6740,5710 D12.1@6820,5710
NetD13_1: D13.1 R178.2 | length 80
  TopLayer (1 oz) w5: R178.2@6580,5710 D13.1@6660,5710
NetD14_1: D14.1 R179.2 | length 80
  TopLayer (1 oz) w5: R179.2@6420,5710 D14.1@6500,5710
NetD15_1: D15.1 R180.2 | length 80
  TopLayer (1 oz) w5: R180.2@5005,280 D15.1@5085,280
NetD16_1: D16.1 R181.2 | length 80
  TopLayer (1 oz) w5: R181.2@5165,280 D16.1@5245,280
NetD17_1: D17.1 R182.2 | length 80
  TopLayer (1 oz) w5: R182.2@4845,280 D17.1@4925,280
NetD18_1: D18.1 R183.2 | length 80
  TopLayer (1 oz) w5: R183.2@4685,280 D18.1@4765,280
NetD19_1: D19.1 R184.2 | length 80
  TopLayer (1 oz) w5: R184.2@4525,280 D19.1@4605,280
NetD20_1: D20.1 R185.2 | length 80
  TopLayer (1 oz) w5: R185.2@4365,280 D20.1@4445,280
NetD21_1: D21.1 R186.2 | length 80
  TopLayer (1 oz) w5: R186.2@6055,280 D21.1@6135,280
NetD22_1: D22.1 R187.2 | length 80
  TopLayer (1 oz) w5: R187.2@6215,280 D22.1@6295,280
NetD23_1: D23.1 R188.2 | length 80
  TopLayer (1 oz) w5: R188.2@5895,280 D23.1@5975,280
NetD24_1: D24.1 R189.2 | length 80
  TopLayer (1 oz) w5: R189.2@5735,280 D24.1@5815,280
NetD25_1: D25.1 R190.2 | length 80
  TopLayer (1 oz) w5: R190.2@5575,280 D25.1@5655,280
NetD26_1: D26.1 R191.2 | length 80
  TopLayer (1 oz) w5: R191.2@5415,280 D26.1@5495,280
NetD27_1: D27.1 R194.2 | length 80
  TopLayer (1 oz) w5: R194.2@7490,2670 D27.1@7570,2670
NetD28_1: D28.1 R193.2 | length 80
  TopLayer (1 oz) w5: R193.2@7650,2670 D28.1@7730,2670
NetD30_1: D30.1 R196.2 | length 80
  TopLayer (1 oz) w5: D30.1@5690,5170 R196.2@5690,5250
NetD30_2: D30.2 U2.T16 | length 358.4
  TopLayer (1 oz) w5: U2.T16@5385.9,4975.9 v1(5405.59,4995.59) ; v1(5620,5135) D30.2@5620,5170
  BottomLayer (1 oz) w5: v1(5405.59,4995.59) 5425.28,5015.28 5500.28,5015.28 5525,5040 5525,5080 5550,5105 5590,5105 v1(5620,5135)
NetD31_1: D31.1 R197.2 | length 80
  TopLayer (1 oz) w5: R197.2@5660,960 D31.1@5660,1040
NetD31_2: D31.2 U3.C17 | length 292.8
  TopLayer (1 oz) w5: U3.C17@5385.9,1204.73 v1(5405.59,1185.04) ; D31.2@5590,1040 v1(5590,1075)
  BottomLayer (1 oz) w5: v1(5405.59,1185.04) 5425.28,1165.35 5499.65,1165.35 v1(5590,1075)
NetJ7_1: J7.1 L5.2 R82.2 | length 325
  TopLayer (1 oz) w5.56: J7.1@135,3530 R82.2@370,3530 L5.2@370,3620
NetJ11_1: J11.1 L6.2 R90.2 | length 325
  TopLayer (1 oz) w5.56: J11.1@1950,5865 R90.2@1950,5630 L6.2@2040,5630
NetJ13_1: J13.1 L7.2 R97.2 | length 315
  TopLayer (1 oz) w5.56: L7.2@3710,370 R97.2@3800,370 ; J13.1@3800,135 R97.2@3800,360
NetJ15_1: J15.1 R102.2 R103.2 | length 295
  TopLayer (1 oz) w5.56: J15.1@2300,135 R103.2@2300,350 R102.2@2300,430
NetJ16_1: J16.1 R105.1 | length 215
  TopLayer (1 oz) w5.56: J16.1@135,2810 R105.1@350,2810
NetJ18_1: J18.1 L8.2 R110.2 | length 315
  TopLayer (1 oz) w5.56: J18.1@135,650 R110.2@360,650 ; R110.2@370,650 L8.2@370,740
NetJP9_7: JP9.7 R192.2 | length 327.6
  TopLayer (1 oz) w5: JP9.7@4770.06,5880.31 4820,5830.37 4820,5630 R192.2@4860,5590
NetJP10_5: JP10.5 R49.2 U10.22 | length 257.6
  TopLayer (1 oz) w12.34: JP10.5@3510,2290 R49.2@3660,2290 ; R49.2@3660,2300 cw(c3714.94,2245.06) 3714.94,2322.76 U10.22@3761.54,2322.76
NetJP10_9: JP10.9 R50.2 U10.21 | length 258.4
  TopLayer (1 oz) w12.34: JP10.9@3510,2390 R50.2@3660,2390 ; R50.2@3660,2380 ccw(c3722.16,2442.16) 3722.16,2354.25 U10.21@3761.54,2354.25
NetJP11_5: JP11.5 R51.2 U11.22 | length 257.6
  TopLayer (1 oz) w12.34: JP11.5@3510,3590 R51.2@3660,3590 ; R51.2@3660,3600 cw(c3714.94,3545.06) 3714.94,3622.76 U11.22@3761.54,3622.76
NetJP11_9: JP11.9 R52.2 U11.21 | length 258.4
  TopLayer (1 oz) w12.34: JP11.9@3510,3690 R52.2@3660,3690 ; R52.2@3660,3680 ccw(c3722.16,3742.16) 3722.16,3654.25 U11.21@3761.54,3654.25
NetJP12_5: JP12.5 R53.2 U12.22 | length 257.6
  TopLayer (1 oz) w12.34: JP12.5@2250,1880 R53.2@2400,1880 ; R53.2@2400,1890 cw(c2454.94,1835.06) 2454.94,1912.76 U12.22@2501.54,1912.76
NetJP12_9: JP12.9 R54.2 U12.21 | length 258.4
  TopLayer (1 oz) w12.34: JP12.9@2250,1980 R54.2@2400,1980 ; R54.2@2400,1970 ccw(c2462.16,2032.16) 2462.16,1944.25 U12.21@2501.54,1944.25
NetJP13_5: JP13.5 R55.2 U13.22 | length 257.6
  TopLayer (1 oz) w12.34: JP13.5@2220,4160 R55.2@2370,4160 ; R55.2@2370,4170 cw(c2424.94,4115.06) 2424.94,4192.76 U13.22@2471.54,4192.76
NetJP13_9: JP13.9 R56.2 U13.21 | length 258.4
  TopLayer (1 oz) w12.34: JP13.9@2220,4260 R56.2@2370,4260 ; R56.2@2370,4250 ccw(c2432.16,4312.16) 2432.16,4224.25 U13.21@2471.54,4224.25
NetL1_1: L1.1 R79.1 R81.1 U16.8 | length 285
  TopLayer (1 oz) w5.56: R79.1@570,4070 570,4160 R81.1@570,4250 ; R81.1@570,4260 U16.8@675,4260
NetL2_1: L2.1 R87.1 R89.1 U17.8 | length 295.3
  TopLayer (1 oz) w5.56: R87.1@2490,5430 2580,5430 R89.1@2670,5430 ccw(c2718.28,5381.72) 2650,5381.72 U17.8@2650,5320
NetL3_1: L3.1 R95.1 R98.1 U18.8 | length 290
  TopLayer (1 oz) w5.56: R98.1@3040,570 U18.8@3040,680 ; R98.1@3050,570 3140,570 R95.1@3230,570
NetL4_1: L4.1 R59.1 R108.1 U19.8 | length 295
  TopLayer (1 oz) w5.56: R108.1@570,1190 570,1280 R59.1@570,1360 ; R59.1@570,1370 R59.1@570,1360 ; U19.8@685,1360 R59.1@570,1360
NetL9_1: L9.1 R93.1 R94.1 U27.2 | length 300
  TopLayer (1 oz) w5.56: R94.1@1540,570 U27.2@1540,690 ; R94.1@1550,570 1640,570 R93.1@1730,570
NetR19_1: R19.1 U14.46 | length 154.3
  TopLayer (1 oz) w5: R19.1@4910,2890 4932.5,2912.5 U14.46@5054.96,2912.5
NetR20_2: R20.2 U14.2 | length 146.4
  TopLayer (1 oz) w5: U14.2@5425.04,2887.5 5532.5,2887.5 R20.2@5560,2860
NetR21_1: R21.1 U14.45 | length 158.4
  TopLayer (1 oz) w5: R21.1@4910,2970 4942.5,2937.5 U14.45@5054.96,2937.5
NetR22_2: R22.2 U14.3 | length 146.4
  TopLayer (1 oz) w5: U14.3@5425.04,2912.5 5532.5,2912.5 R22.2@5560,2940
NetR23_1: R23.1 U10.31 | length 118.6
  TopLayer (1 oz) w5: U10.31@3998.74,2211.54 3998.74,2151.26 R23.1@4040,2110
NetR24_1: R24.1 U10.27 | length 101.5
  TopLayer (1 oz) w5: R24.1@3872.76,2110 U10.27@3872.76,2211.54
NetR25_1: R25.1 U11.31 | length 118.6
  TopLayer (1 oz) w5: U11.31@3998.74,3511.54 3998.74,3451.26 R25.1@4040,3410
NetR26_1: R26.1 U11.27 | length 101.5
  TopLayer (1 oz) w5: R26.1@3872.76,3410 U11.27@3872.76,3511.54
NetR27_1: R27.1 U12.31 | length 118.6
  TopLayer (1 oz) w5: U12.31@2738.74,1801.54 2738.74,1741.26 R27.1@2780,1700
NetR28_1: R28.1 U12.27 | length 101.5
  TopLayer (1 oz) w5: R28.1@2612.76,1700 U12.27@2612.76,1801.54
NetR29_1: R29.1 U13.31 | length 118.6
  TopLayer (1 oz) w5: U13.31@2708.74,4081.54 2708.74,4021.26 R29.1@2750,3980
NetR30_1: R30.1 U13.27 | length 101.5
  TopLayer (1 oz) w5: R30.1@2582.76,3980 U13.27@2582.76,4081.54
NetR31_1: R31.1 R40.2 U9.17 U10.3 | length 1622.9
  TopLayer (1 oz) w12.34: v1(3615,2891.61) U9.17@3671.06,2891.61 ; U10.3@4078.46,2322.76 4125.06,2322.76 cw(c4125.06,2245.06) R31.1@4180,2300
  MidLayer1 (0.5 oz) w5.07: v1(3615,2891.61) 3554.25,2891.61 ccw(c3554.25,2800.75) 3490,2865 ccw(c3538.28,2816.72) 3470,2816.72 v1(3470,2810) 3470,2805 ccw(c3590.71,2805) 3505.36,2719.64 3544.64,2680.36 ccw(c3630,2765.71) 3630,2645 4125,2645 cw(c4125,2524.29) 4210.36,2609.64 4294.64,2525.36 cw(c4209.29,2440) 4330,2440 4330,2430 cw(c4209.29,2430) 4294.64,2344.64 4285.36,2335.36 cw(c4200,2420.71) v1(4200,2300)
NetR31_2: R31.2 R39.2 U9.16 U10.4 | length 1616.4
  TopLayer (1 oz) w12.34: v1(3597.2,2917.2) U9.16@3671.06,2917.2 ; U10.4@4078.46,2354.25 4141.98,2354.25 ccw(c4141.98,2408.02) R31.2@4180,2370
  MidLayer1 (0.5 oz) w5.07: v1(3597.2,2917.2) 3497.75,2917.2 ccw(c3497.75,2807.25) 3420,2885 ccw(c3492.43,2812.57) 3390,2812.57 v1(3390,2810) 3390,2775 ccw(c3510.71,2775) 3425.36,2689.64 3509.64,2605.36 ccw(c3595,2690.71) 3595,2570 4095,2570 cw(c4095,2449.29) 4180.36,2534.64 4241.97,2473.03 cw(c4198.43,2429.5) 4260,2429.5 cw(c4200.86,2429.5) 4242.68,2387.68 cw(c4200,2430.36) v1(4200,2370)
NetR34_1: R34.1 R42.2 U9.15 U11.3 | length 1781.8
  TopLayer (1 oz) w12.34: v1(3615,2942.8) U9.15@3671.06,2942.8 ; U11.3@4078.46,3622.76 4125.06,3622.76 cw(c4125.06,3545.06) R34.1@4180,3600
  MidLayer4 (0.5 oz) w5.07: v1(3615,2942.8) 3480.68,2942.8 cw(c3480.68,3035.68) 3415,2970 cw(c3475.36,3030.36) 3390,3030.36 v1(3390,3050) 3390,3095 cw(c3510.71,3095) 3425.36,3180.36 3449.64,3204.64 cw(c3535,3119.29) 3535,3240 4040,3240 ccw(c4040,3360.71) 4125.36,3275.36 4273.08,3423.08 ccw(c4196.01,3500.15) 4305,3500.15 ccw(c4208.79,3500.15) 4276.82,3568.18 ccw(c4200,3491.36) v1(4200,3600)
NetR34_2: R34.2 R41.2 U9.14 U11.4 | length 1784.2
  TopLayer (1 oz) w12.34: v1(3595,2968.39) U9.14@3671.06,2968.39 ; U11.4@4078.46,3654.25 4141.98,3654.25 ccw(c4141.98,3708.02) R34.2@4180,3670
  MidLayer4 (0.5 oz) w5.07: v1(3595,2968.39) 3554.25,2968.39 cw(c3554.25,3059.25) 3490,2995 cw(c3538.28,3043.28) 3470,3043.28 v1(3470,3050) 3470,3060 cw(c3590.71,3060) 3505.36,3145.36 cw(c3588.99,3061.72) 3588.99,3180 4075,3180 ccw(c4075,3300.71) 4160.36,3215.36 4344.64,3399.64 ccw(c4259.29,3485) 4380,3485 4380,3520 ccw(c4259.29,3520) 4344.64,3605.36 4315.36,3634.64 ccw(c4230,3549.29) 4230,3670 v1(4200,3670)
NetR35_1: R35.1 R46.2 U9.19 U12.3 | length 1514.5
  TopLayer (1 oz) w12.34: U12.3@2818.46,1912.76 2865.06,1912.76 cw(c2865.06,1835.06) R35.1@2920,1890 ; v1(3550,2830) cw(c3575.19,2804.81) 3575.19,2840.43 U9.19@3671.06,2840.43
  MidLayer4 (0.5 oz) w5.07: v1(2940,1890) 2980,1890 ccw(c2980,2010.71) 3065,1925 ; 3065.36,1925.36 cw(c2980,2010.71) 3065,1925 ; v1(3550,2830) 3330.36,2610.36 cw(c3245,2695.71) 3245,2575 3234.17,2575 ccw(c3234.17,2463.54) 3155.36,2542.36 ccw(c3240.71,2457) 3120,2457 3120,2030 cw(c2999.29,2030) 3085,1945 3065,1925
NetR35_2: R35.2 R45.2 U9.18 U12.4 | length 1515.5
  TopLayer (1 oz) w12.34: U12.4@2818.46,1944.25 2881.98,1944.25 ccw(c2881.98,1998.02) R35.2@2920,1960 ; v1(3530,2866.02) U9.18@3671.06,2866.02
  MidLayer4 (0.5 oz) w5.07: v1(2940,1960) 2957.22,1960 ccw(c2957.22,2027.07) 3004.64,1979.64 ccw(c2919.29,2065) 3040,2065 3040,2521 cw(c3160.71,2521) 3075.36,2606.36 3273.64,2804.64 cw(c3359,2719.29) 3359,2840 3438.54,2840 ccw(c3438.54,2901.46) 3482,2858 cw(c3501.37,2838.63) 3501.37,2866.02 v1(3530,2866.02)
NetR38_1: R38.1 R47.2 U9.12 U13.4 | length 1733
  TopLayer (1 oz) w12.34: U13.4@2788.46,4224.25 2851.98,4224.25 ccw(c2851.98,4278.02) R38.1@2890,4240 ; v1(3550,3030) ccw(c3575.19,3055.19) 3575.19,3019.57 U9.12@3671.06,3019.57
  MidLayer1 (0.5 oz) w5.07: v1(2910,4240) 2935,4240 cw(c2935,4119.29) 3020.36,4204.64 3089.64,4135.36 cw(c3004.29,4050) 3125,4050 3125,3505 ccw(c3245.71,3505) 3160.36,3419.64 v1(3550,3030)
NetR38_2: R38.2 R48.2 U9.13 U13.3 | length 1736.9
  TopLayer (1 oz) w12.34: U13.3@2788.46,4192.76 2835.06,4192.76 cw(c2835.06,4115.06) R38.2@2890,4170 ; v1(3530,2993.98) U9.13@3671.06,2993.98
  MidLayer1 (0.5 oz) w5.07: v1(2910,4170) cw(c2910,4061.36) 2986.82,4138.18 3019.64,4105.36 cw(c2934.29,4020) 3055,4020 3055,3571.92 cw(c3002.07,3571.92) 3039.5,3534.5 ccw(c3074.5,3499.5) 3025,3499.5 ccw(c3144.5,3499.5) 3048.9,3427.8 ccw(c3144.5,3499.5) 3060,3415 3446.39,3028.61 ccw(c3530,3112.21) v1(3530,2993.98)
NetR43_2: R43.2 R198.1 U9.5 X1.1 | length 819.1
  TopLayer (1 oz) w12.34: U9.5@3928.94,2917.2 3984.32,2917.2 cw(c3984.32,2824.32) R198.1@4050,2890 R43.2@4130,2890 4300,2890 cw(c4300,2769.29) 4385.36,2854.64 X1.1@4630,2610
NetR44_2: R44.2 R199.1 U9.6 X1.8 | length 816.5
  TopLayer (1 oz) w12.34: U9.6@3928.94,2942.8 3984.32,2942.8 ccw(c3984.32,3035.68) R199.1@4050,2970 R44.2@4130,2970 4155.79,2970 cw(c4155.79,2918.79) 4192,2955 ccw(c4240.28,3003.28) 4240.28,2935 4307,2935 ccw(c4307,3055.71) 4392.36,2970.36 4414.64,2992.64 ccw(c4329.29,3078) 4450,3078 4450,3091.01 ccw(c4331.72,3091.01) 4415.36,3174.64 ccw(c4330,3089.29) X1.8@4330,3210
NetR60_2: R60.2 R155.1 R160.2 R161.2 | length 240
  TopLayer (1 oz) w5: R155.1@1890,770 R160.2@1810,770 R161.2@1810,850 R60.2@1890,850
NetR66_2: R66.2 U25.9 | length 105.6
  TopLayer (1 oz) w5.56: R66.2@3310,5350 cw(c3262.05,5302.05) 3329.86,5302.05 U25.9@3329.86,5249.68
NetR69_2: R69.2 U25.8 | length 100.2
  TopLayer (1 oz) w5.56: U25.8@3379.86,5249.68 R69.2@3379.86,5349.86
NetR77_2: R77.2 U26.9 | length 108.3
  TopLayer (1 oz) w5.56: R77.2@650,2010 cw(c722.09,1937.91) 722.09,2039.86 U26.9@750.32,2039.86
NetR78_2: R78.2 U26.8 | length 100.2
  TopLayer (1 oz) w5.56: R78.2@650.14,2089.86 U26.8@750.32,2089.86
NetR80_1: R80.1 R118.2 U16.7 | length 185.3
  TopLayer (1 oz) w5.56: R118.2@495,4330 R80.1@575,4330 ccw(c623.28,4378.28) 623.28,4310 U16.7@675,4310
NetR88_1: R88.1 R119.2 U17.7 | length 174.8
  TopLayer (1 oz) w5.56: U17.7@2700,5320 cw(c2820.71,5320) R88.1@2735.36,5405.36 ; R88.1@2750,5420 R119.2@2750,5500
NetR96_1: R96.1 R121.2 U18.7 | length 185.3
  TopLayer (1 oz) w5.56: R121.2@2970,500 R96.1@2970,580 ccw(c2921.72,628.28) 2990,628.28 U18.7@2990,680
NetR104_2: R104.2 R135.1 | length 80
  TopLayer (1 oz) w5.56: R135.1@2380,350 R104.2@2380,430
NetR109_1: R109.1 R125.2 U19.7 | length 146.4
  TopLayer (1 oz) w5.56: R125.2@505,1450 R109.1@585,1450 ; R109.1@600.25,1434.75 ccw(c660,1494.5) U19.7@660,1410
NetR113_1: R113.1 U16.4 | length 100
  TopLayer (1 oz) w5: U16.4@895,4410 R113.1@995,4410
NetR114_1: R114.1 U17.4 | length 100
  TopLayer (1 oz) w5: R114.1@2800,5000 U17.4@2800,5100
NetR115_1: R115.1 U18.4 | length 100
  TopLayer (1 oz) w5: U18.4@2890,900 R115.1@2890,1000
NetR116_1: R116.1 U19.4 | length 100
  TopLayer (1 oz) w5: U19.4@905,1510 R116.1@1005,1510
NetR120_1: R120.1 R219.1 U27.1 | length 200.3
  TopLayer (1 oz) w5.56: R120.1@1470,495 R219.1@1470,575 ccw(c1421.72,623.28) 1490,623.28 U27.1@1490,690
NetR131_1: R131.1 U24.7 | length 100
  TopLayer (1 oz) w5.56: U24.7@4040,5400 R131.1@4040,5500
NetR146_2: R146.2 U24.4 | length 100
  TopLayer (1 oz) w5: U24.4@4140,5180 R146.2@4240,5180
NetR164_1: R164.1 U27.4 | length 100
  TopLayer (1 oz) w5: U27.4@1640,690 R164.1@1740,690
NetR165_2: R165.2 U28.9 | length 171.6
  TopLayer (1 oz) w5: U28.9@2410,1020 2440,1050 2480,1050 2498.43,1068.43 R165.2@2561.57,1068.43
NetR195_2: R195.2 U7.27 | length 102.3
  TopLayer (1 oz) w5: U7.27@6866.97,3404.29 R195.2@6969.29,3404.29
NetR201_2: R201.2 U1.V12 | length 293
  TopLayer (1 oz) w12: U1.V12@2610,3075 v1(2635,3100)
  MidLayer2 (0.5 oz) w5: v1(2635,3100) 2665,3130 2745,3130 2830,3215 v1(2830,3230)
NetR202_2: R202.2 U1.F19 | length 218.1
  TopLayer (1 oz) w12: v1(1985,3450) U1.F19@2010,3425 ; v1(2040,3580) R202.2@2040,3610
  MidLayer2 (0.5 oz) w5: v1(1985,3450) 2010,3475 2010,3550 v1(2040,3580)
NetR203_2: R203.2 U1.R2 | length 226.4
  TopLayer (1 oz) w12: R203.2@2410,2390 v1(2410,2420) ; U1.R2@2460,2575 v1(2485,2550)
  MidLayer3 (0.5 oz) w5: v1(2410,2420) 2460,2470 2460,2525 v1(2485,2550)
NetR204_2: R204.2 U1.Y9 | length 175.2
  TopLayer (1 oz) w12: U1.Y9@2710,2925 2765,2925 R204.2@2850,2840
NetR205_1: R205.1 U1.W11 | length 188.6
  TopLayer (1 oz) w12: U1.W11@2660,3025 v1(2685,3050)
  MidLayer3 (0.5 oz) w5: v1(2685,3050) 2705,3070 v1(2830,3070)
NetR206_1: R206.1 U1.Y12 | length 151.1
  TopLayer (1 oz) w12: U1.Y12@2710,3075 v1(2735,3100)
  MidLayer3 (0.5 oz) w5: v1(2735,3100) 2780,3100 v1(2830,3150)
NetR207_1: R207.1 U1.L18 | length 310.6
  TopLayer (1 oz) w12: v1(2120,3580) R207.1@2120,3610 ; v1(2235,3400) U1.L18@2260,3375
  MidLayer4 (0.5 oz) w5: v1(2120,3580) 2120,3560 2160,3520 2160,3445 2180,3425 2210,3425 v1(2235,3400)
NetR208_1: R208.1 U1.L19 | length 230.6
  TopLayer (1 oz) w12: v1(2200,3580) R208.1@2200,3610 ; v1(2235,3450) U1.L19@2260,3425
  MidLayer4 (0.5 oz) w5: v1(2200,3580) 2260,3520 2260,3475 v1(2235,3450)
NetR209_1: R209.1 U1.R3 | length 292.3
  TopLayer (1 oz) w12: U1.R3@2460,2625 v1(2485,2600) ; R209.1@2570,2390 v1(2570,2420)
  MidLayer1 (0.5 oz) w5: v1(2485,2600) 2510,2575 2510,2540 2525,2525 2545,2525 2560,2510 2560,2475 2570,2465 v1(2570,2420)
NetR210_1: R210.1 U1.R4 | length 436.6
  TopLayer (1 oz) w12: U1.R4@2460,2675 v1(2485,2650) ; R210.1@2720,2390 v1(2720,2425)
  MidLayer1 (0.5 oz) w5: v1(2485,2650) 2515,2620 2550,2620 2560,2610 2560,2590 2575,2575 2595,2575 2610,2560 2610,2540 2625,2525 2645,2525 2660,2510 2660,2485 v1(2720,2425)
NetR211_1: R211.1 U1.Y4 | length 140
  TopLayer (1 oz) w12: U1.Y4@2710,2675 R211.1@2850,2675
NetR212_1: R212.1 U1.W4 | length 221.1
  TopLayer (1 oz) w12: U1.W4@2660,2675 2685,2650 2800,2650 R212.1@2850,2600
NetR220_1: R220.1 R223.1 X2.5 | length 633
  TopLayer (1 oz) w12.34: X2.5@1646,4670 2150,4670 2170,4650 2170,4620 R223.1@2120,4570
NetR221_1: R221.1 R222.1 X2.4 | length 395
  TopLayer (1 oz) w12.34: X2.4@1645,4570 R222.1@2040,4570
NetR224_1: R224.1 R227.1 X3.5 | length 364
  TopLayer (1 oz) w12.34: X3.5@3350,1626 R227.1@3350,1990
NetR225_1: R225.1 R226.1 X3.4 | length 669.6
  TopLayer (1 oz) w12.34: R226.1@3440,1990 3600,1990 3630,1960 3630,1870 3600,1840 3500,1840 R225.1@3450,1790 X3.4@3450,1626
NetR228_1: R228.1 R231.1 X4.5 | length 324
  TopLayer (1 oz) w12.34: X4.5@1746,1590 R231.1@2070,1590
NetR229_1: R229.1 R230.1 X4.4 | length 756.3
  TopLayer (1 oz) w12.34: X4.4@1746,1490 1955,1490 2105,1340 2155,1340 2195,1380 2195,1545 R230.1@2150,1590
NetR232_1: R232.1 R235.1 X5.5 | length 803.7
  TopLayer (1 oz) w12.34: X5.5@3350,4414 R232.1@3350,4240 3320,4210 3320,4105 3350,4075 3540,4075 3570,4045 3570,4010 3540,3980 R235.1@3410,3980
NetR233_1: R233.1 R234.1 X5.4 | length 467.1
  TopLayer (1 oz) w12.34: X5.4@3250,4414 3250,4060 R234.1@3330,3980
NetU2_C13: 
NetU2_D14: 
NetU2_E15: 
OSCA+_07: JP11.2 R234.2 | length 453.1
  TopLayer (1 oz) w12.34: R234.2@3330,3910 3360,3880 3360,3540 JP11.2@3410,3490
OSCA-_07: JP11.14 R235.2 | length 120
  TopLayer (1 oz) w12.34: JP11.14@3410,3790 R235.2@3410,3910
OSCB+_07: JP13.2 R222.2 | length 473.1
  TopLayer (1 oz) w12.34: R222.2@2040,4500 2070,4470 2070,4110 JP13.2@2120,4060
OSCB-_07: JP13.14 R223.2 | length 140
  TopLayer (1 oz) w12.34: JP13.14@2120,4360 R223.2@2120,4500
OSCC+_07: JP12.2 R230.2 | length 120
  TopLayer (1 oz) w12.34: R230.2@2150,1660 JP12.2@2150,1780
OSCC-_07: JP12.14 R231.2 | length 555.1
  TopLayer (1 oz) w12.34: R231.2@2070,1660 2000,1730 2000,2005 2025,2030 2100,2030 JP12.14@2150,2080
OSCD+_07: JP10.2 R226.2 | length 142.4
  TopLayer (1 oz) w12.34: JP10.2@3410,2190 3410,2090 R226.2@3440,2060
OSCD-_07: JP10.14 R227.2 | length 450.7
  TopLayer (1 oz) w12.34: R227.2@3360,2060 3360,2440 JP10.14@3410,2490
OUTA1+: R62.2 U1.B12 U16.1 | length 2055.1
  TopLayer (1 oz) w12.34: v1(835,4260) U16.1@895,4260 R62.2@995,4260 ; v1(1785,3100) U1.B12@1810,3075
  MidLayer4 (0.5 oz) w5.07: v1(835,4260) ccw(c835,4139.29) 749.64,4224.64 ccw(c833.28,4141.01) 715,4141.01 715,4130 ccw(c835.71,4130) 750.36,4044.64 ccw(c833.99,4128.28) 833.99,4010 970,4010 cw(c970,3889.29) 1055.36,3974.64 1299.64,3730.36 cw(c1214.29,3645) 1335,3645 1335,3445 ccw(c1455.71,3445) 1370.36,3359.64 1529.64,3200.36 ccw(c1615,3285.71) 1615,3165 1628.08,3165 cw(c1628.08,3112.07) 1665.5,3149.5 ccw(c1712.57,3196.57) 1712.57,3130 cw(c1712.57,3027.57) v1(1785,3100)
OUTA1-: R62.1 U1.A12 U16.2 | length 2062.6
  TopLayer (1 oz) w12.34: v1(835,4310) U16.2@895,4310 R62.1@995,4310 ; v1(1735,3100) U1.A12@1760,3075
  MidLayer4 (0.5 oz) w5.07: v1(835,4310) 810,4310 ccw(c810,4189.29) 724.64,4274.64 695.36,4245.36 ccw(c780.71,4160) 660,4160 660,4105 ccw(c780.71,4105) 695.36,4019.64 1179.64,3535.36 cw(c1094.29,3450) 1215,3450 ccw(c1335.71,3450) 1250.36,3364.64 1464.64,3150.36 ccw(c1550,3235.71) 1550,3115 1698.79,3115 cw(c1698.79,3063.79) v1(1735,3100)
OUTA2+: C67.1 U1.B15 | length 2618.6
  TopLayer (1 oz) w12.34: v1(1040,5460) C67.1@1040,5500 ; v1(1785,3250) U1.B15@1810,3225
  MidLayer4 (0.5 oz) w5.07: v1(1040,5460) 1040,5440 ccw(c1160.71,5440) 1075.36,5354.64 1454.64,4975.36 cw(c1369.29,4890) 1490,4890 1490,3565 ccw(c1610.71,3565) 1525.36,3479.64 1584.63,3420.37 ccw(c1670,3505.71) 1670,3385 1681.01,3385 cw(c1681.01,3302.93) 1739.04,3360.96 cw(c1688.43,3310.36) 1760,3310.36 ccw(c1845.36,3310.36) v1(1785,3250)
OUTA2-: C70.1 U1.A15 | length 2622.1
  TopLayer (1 oz) w12.34: v1(960,5460) C70.1@960,5500 ; v1(1735,3250) U1.A15@1760,3225
  MidLayer4 (0.5 oz) w5.07: v1(960,5460) 960,5440 ccw(c1080.71,5440) 995.36,5354.64 1399.64,4950.36 cw(c1314.29,4865) 1435,4865 1435,3535 ccw(c1555.71,3535) 1470.36,3449.64 1580.25,3339.75 ccw(c1640,3399.5) 1640,3315 cw(c1640,3242.57) 1691.21,3293.79 v1(1735,3250)
OUTB1+: R67.2 U1.B18 U17.1 | length 2745.8
  TopLayer (1 oz) w12.34: v1(1785,3400) U1.B18@1810,3375 ; R67.2@2650,4990 2650,5000 U17.1@2650,5100 v1(2650,5160)
  MidLayer4 (0.5 oz) w5.07: v1(1785,3400) 1685.36,3499.64 cw(c1770.71,3585) 1650,3585 cw(c1734.5,3585) 1674.75,3644.75 ccw(c1613.79,3705.71) 1700,3705.71 1700,3859.64 ccw(c1614.64,3859.64) 1675,3920 cw(c1735.36,3980.36) 1650,3980.36 cw(c1733.64,3980.36) 1674.5,4039.5 ccw(c1612.93,4101.07) 1700,4101.07 1700,4144.29 ccw(c1613.79,4144.29) 1674.75,4205.25 cw(c1734.5,4265) 1650,4265 1650,4285 cw(c1770.71,4285) 1685.36,4370.36 2194.64,4879.64 cw(c2280,4794.29) 2280,4915 2400,4915 ccw(c2400,5035.71) 2485.36,4950.36 ccw(c2401.72,5033.99) 2520,5033.99 2520,5139.79 cw(c2629.14,5139.79) 2551.97,5216.97 cw(c2583.43,5185.5) 2583.43,5230 cw(c2583.43,5165.86) 2628.79,5211.21 cw(c2577.57,5160) v1(2650,5160)
OUTB1-: R67.1 U1.A18 U17.2 | length 2753.7
  TopLayer (1 oz) w12.34: v1(1735,3400) U1.A18@1760,3375 ; R67.1@2700,5000 U17.2@2700,5100 v1(2700,5160)
  MidLayer4 (0.5 oz) w5.07: v1(1735,3400) 1625.36,3509.64 cw(c1710.71,3595) 1590,3595 1590,4300 cw(c1710.71,4300) 1625.36,4385.36 2484.64,5244.64 cw(c2570,5159.29) 2570,5280 2581.01,5280 cw(c2581.01,5161.72) 2664.64,5245.36 cw(c2579.29,5160) v1(2700,5160)
OUTB2+: R64.1 U1.B20 U24.2 | length 3883.6
  TopLayer (1 oz) w12.34: U1.B20@1810,3475 v1(1810,3505) ; R64.1@4040,5080 U24.2@4040,5180 v1(4040,5240)
  MidLayer4 (0.5 oz) w5.07: v1(1810,3505) 1810,4280 cw(c1930.71,4280) 1845.36,4365.36 2249.64,4769.64 cw(c2335,4684.29) 2335,4805 3750,4805 ccw(c3750,4925.71) 3835.36,4840.36 3854.64,4859.64 ccw(c3769.29,4945) 3890,4945 3890,5215.65 cw(c3997.07,5215.65) 3921.35,5291.35 cw(c3978.43,5234.29) 3978.43,5315 cw(c3978.43,5262.93) 4015.25,5299.75 cw(c3955.5,5240) v1(4040,5240)
OUTB2-: R64.2 U1.A20 U24.3 | length 3890.3
  TopLayer (1 oz) w12.34: U1.A20@1760,3475 v1(1760,3505) ; R64.2@4090,5080 U24.3@4090,5180 v1(4090,5240)
  MidLayer4 (0.5 oz) w5.07: v1(1760,3505) 1760,4315 cw(c1880.71,4315) 1795.36,4400.36 2219.64,4824.64 cw(c2305,4739.29) 2305,4860 3445,4860 ccw(c3445,4980.71) 3530.36,4895.36 3794.64,5159.64 ccw(c3709.29,5245) 3830,5245 cw(c3914.5,5245) 3854.75,5304.75 3891.72,5341.72 cw(c3960,5273.43) 3960,5370 cw(c3960,5249.29) 4045.36,5334.64 4054.64,5325.36 cw(c3969.29,5240) v1(4090,5240)
OUTC1+: R71.2 U1.B2 U18.1 | length 2540.1
  TopLayer (1 oz) w12.34: v1(1785,2550) U1.B2@1810,2575 ; U18.1@3040,900 R71.2@3040,1000
  MidLayer4 (0.5 oz) w5.07: v1(1785,2550) 1740.36,2505.36 ccw(c1825.71,2420) 1705,2420 1705,1965 ccw(c1825.71,1965) 1740.36,1879.64 2299.64,1320.36 ccw(c2385,1405.71) 2385,1285 2815,1285 cw(c2815,1164.29) 2900.36,1249.64 3014.64,1135.36 cw(c2929.29,1050) 3050,1050 v1(3050,1020)